# Altium PCB PCB2.PcbDoc
Units mm, origin at the board's own origin, x right, y up, seen from the top; angles counter-clockwise.
Board outline 86.99 x 90.68 mm, 4 copper layers (Top Layer, GND, POWER, Bottom Layer), stack 0.603 mm thick; 54 components, 32 nets, 166 pads, 115 vias.
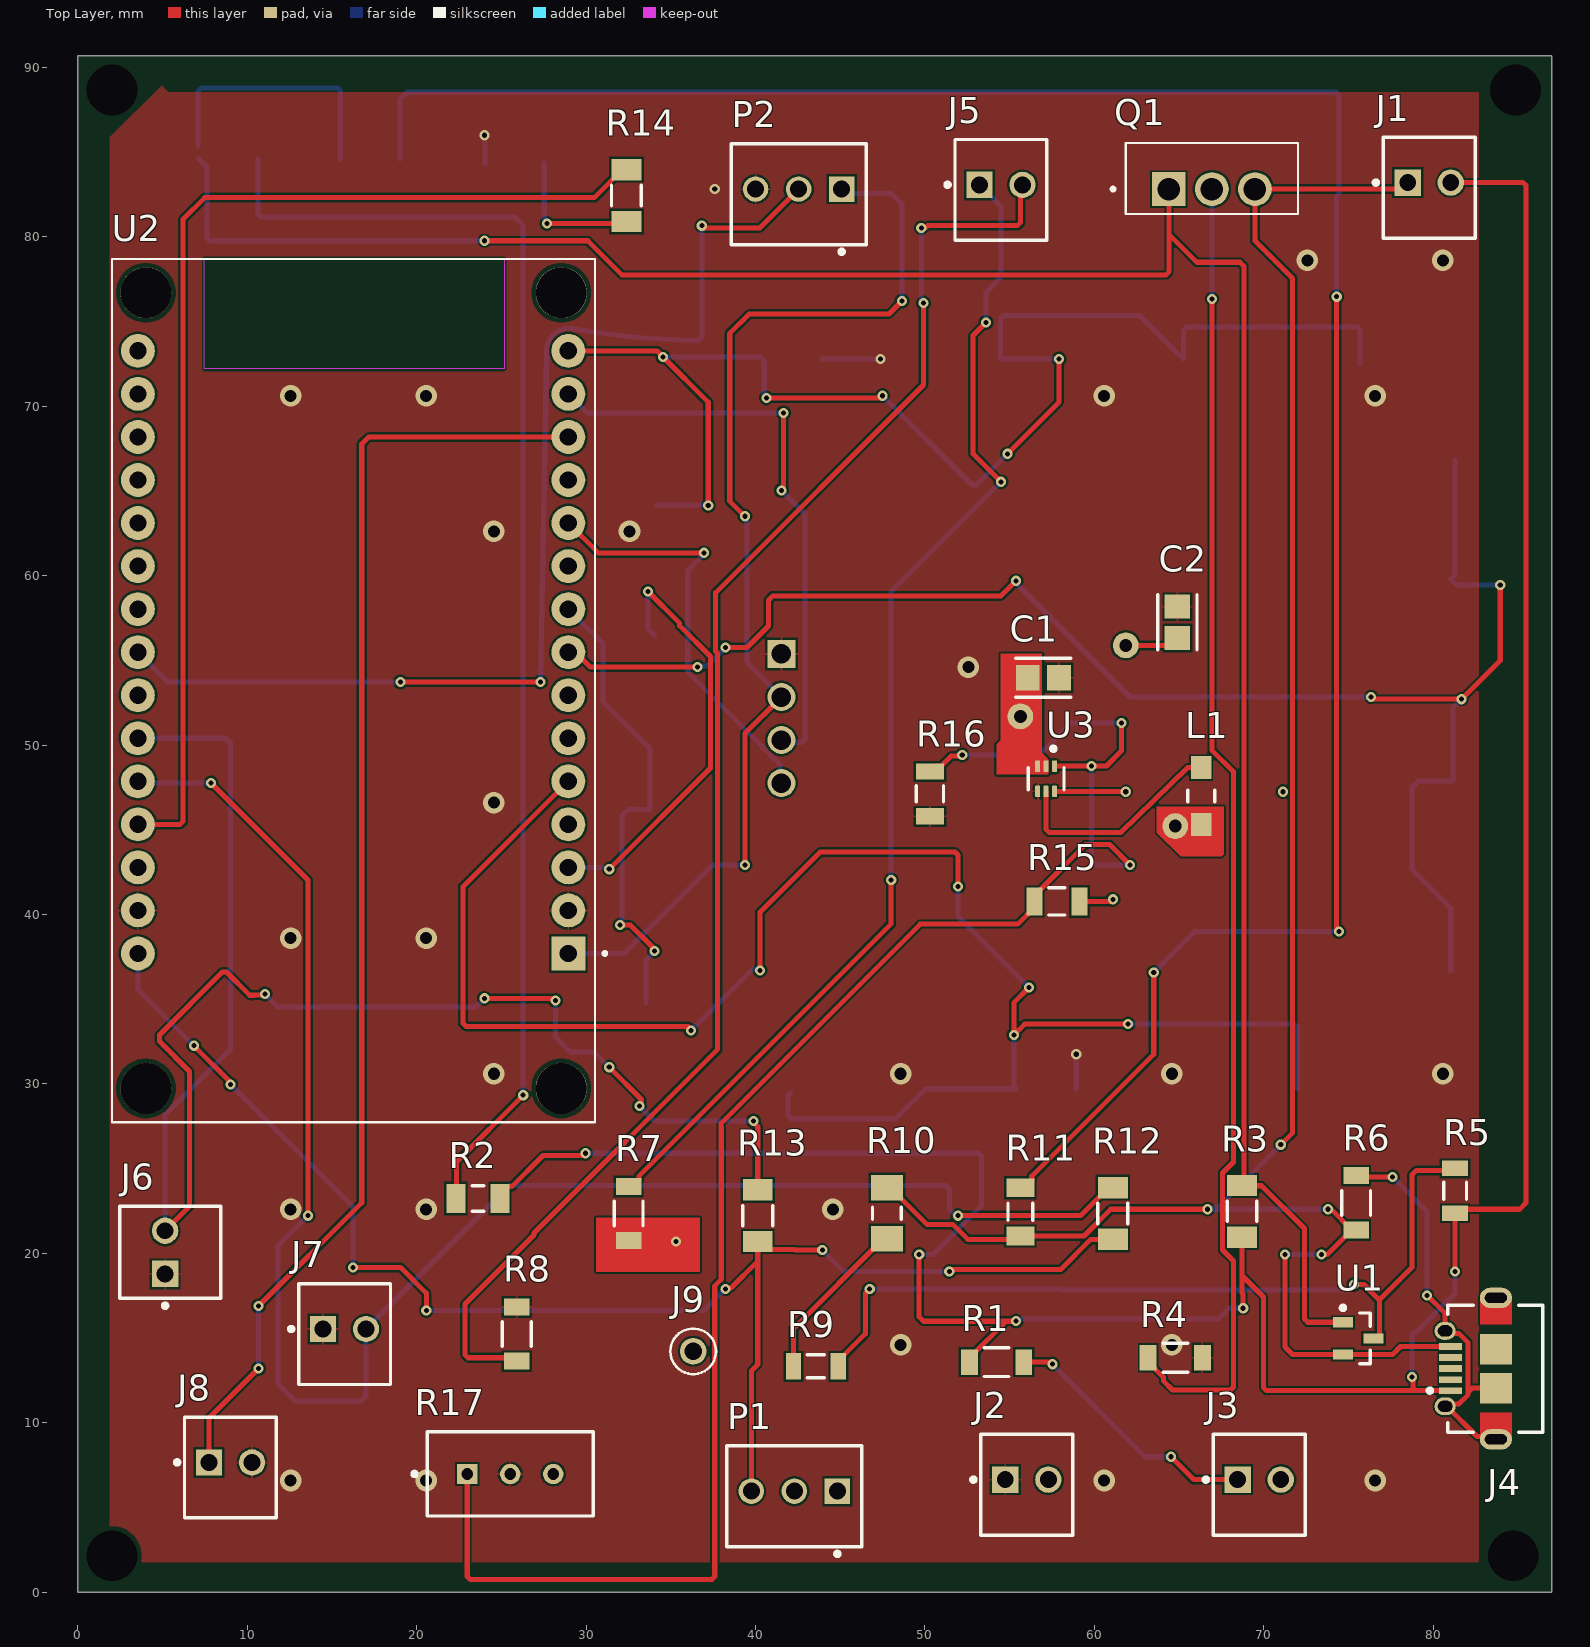
[diagram p0: Top Layer view]
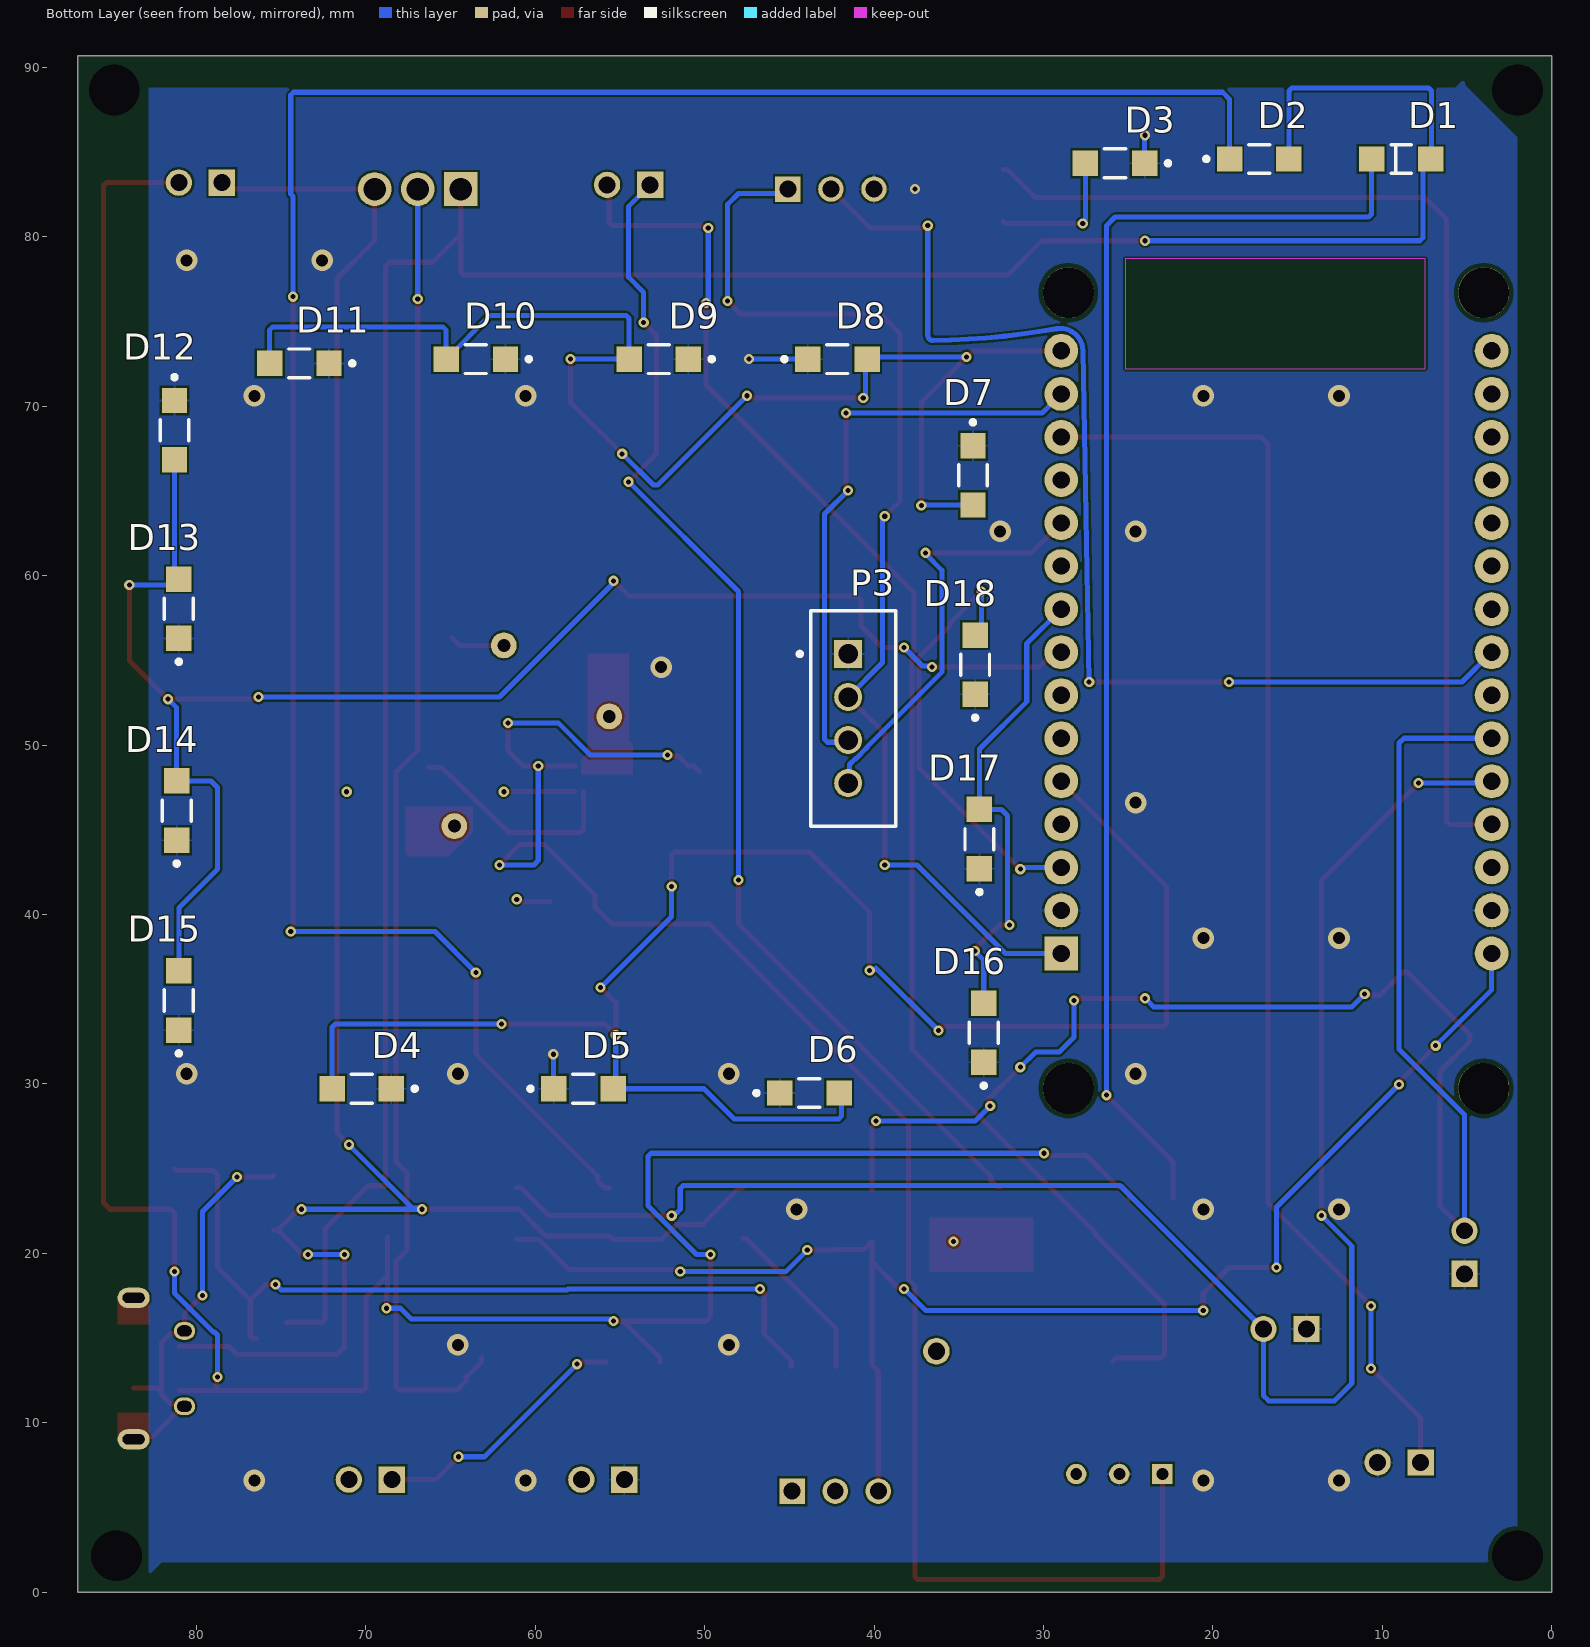
[diagram p1: Bottom Layer view, seen from below]
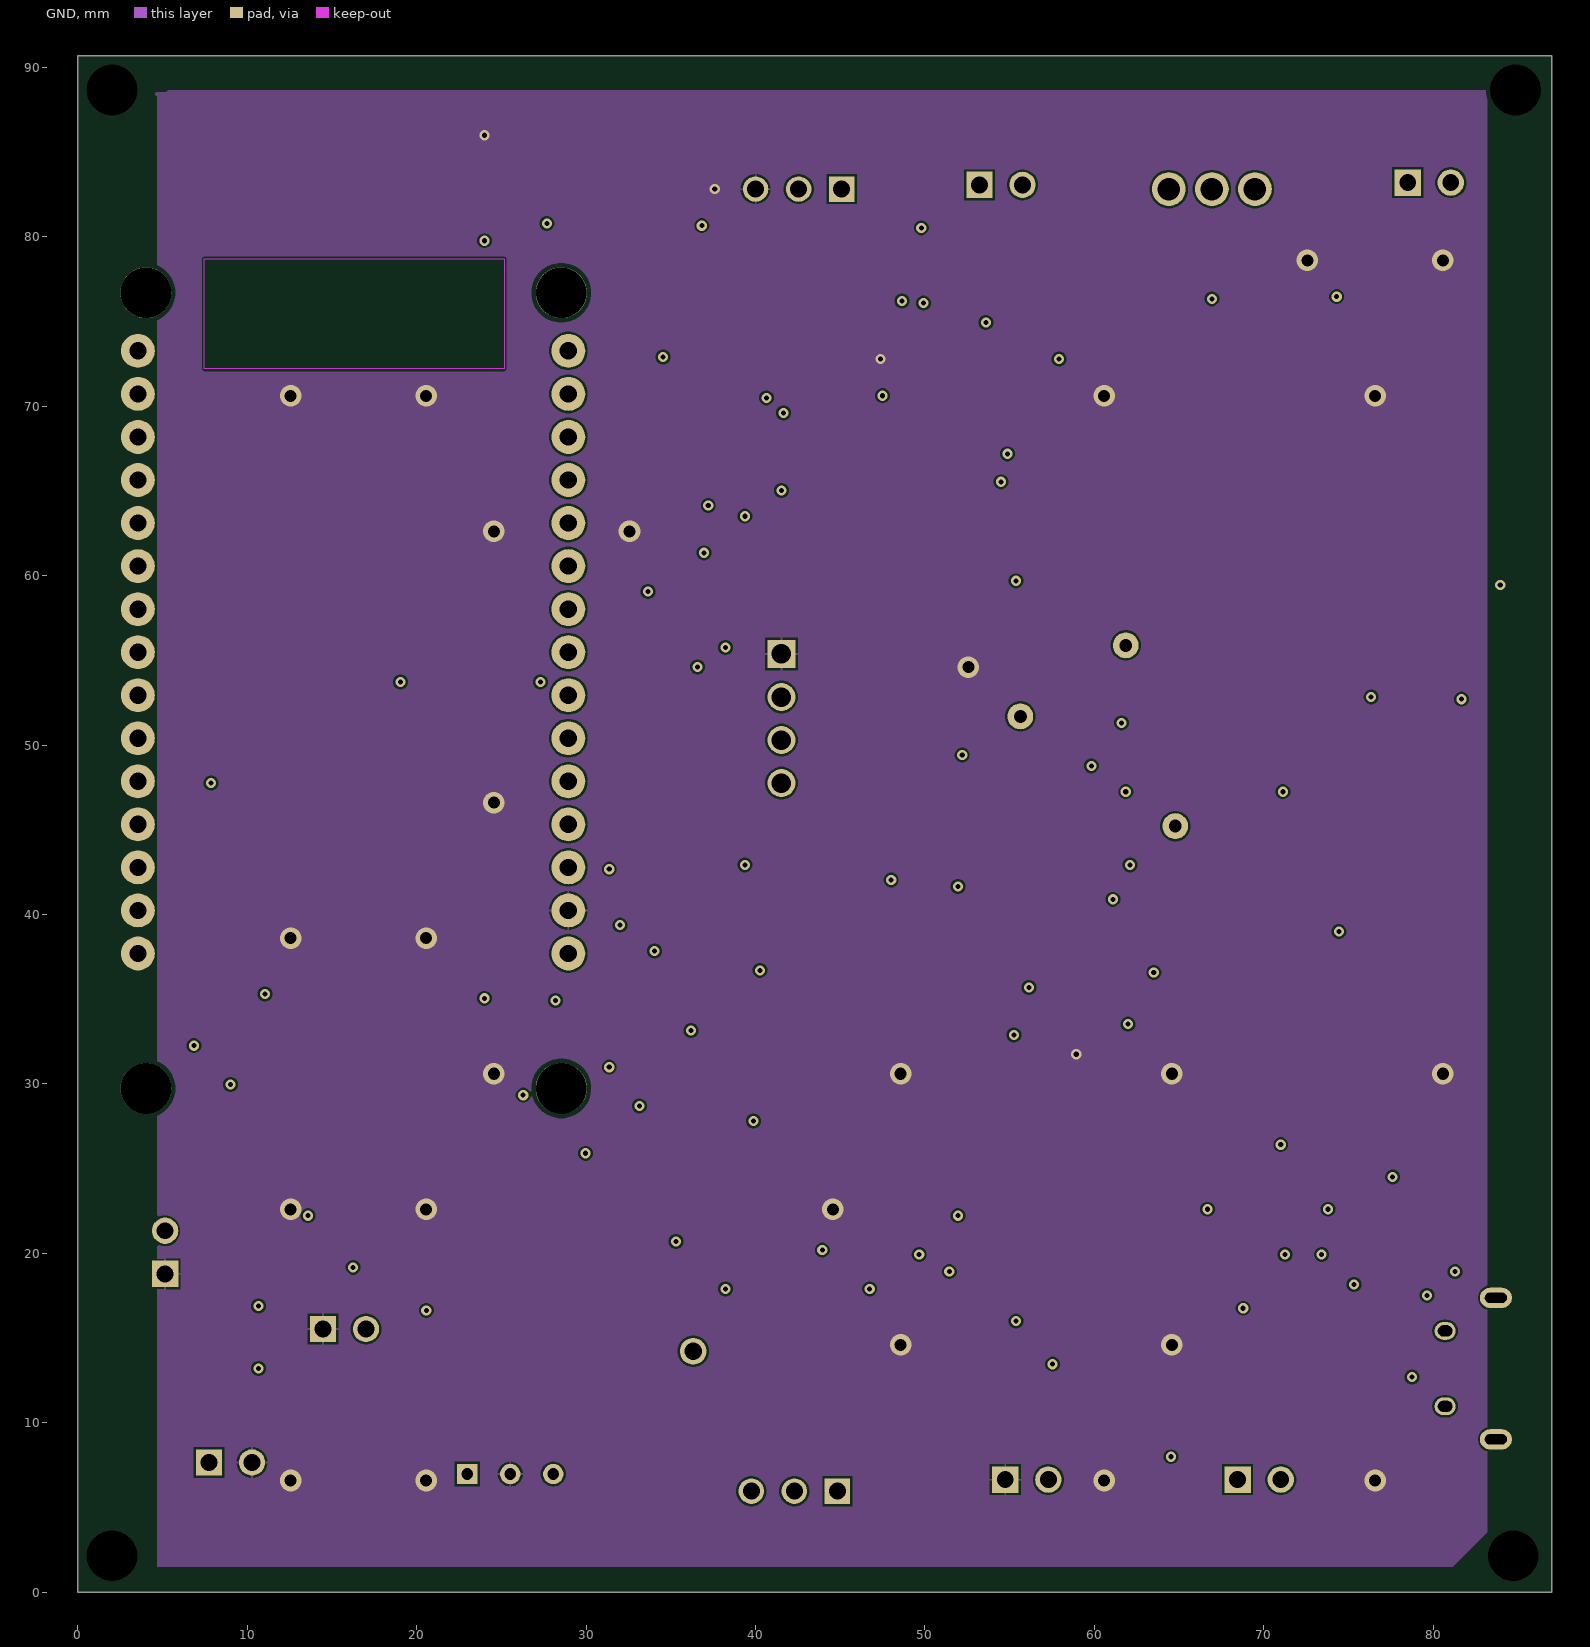
[diagram p2: GND]
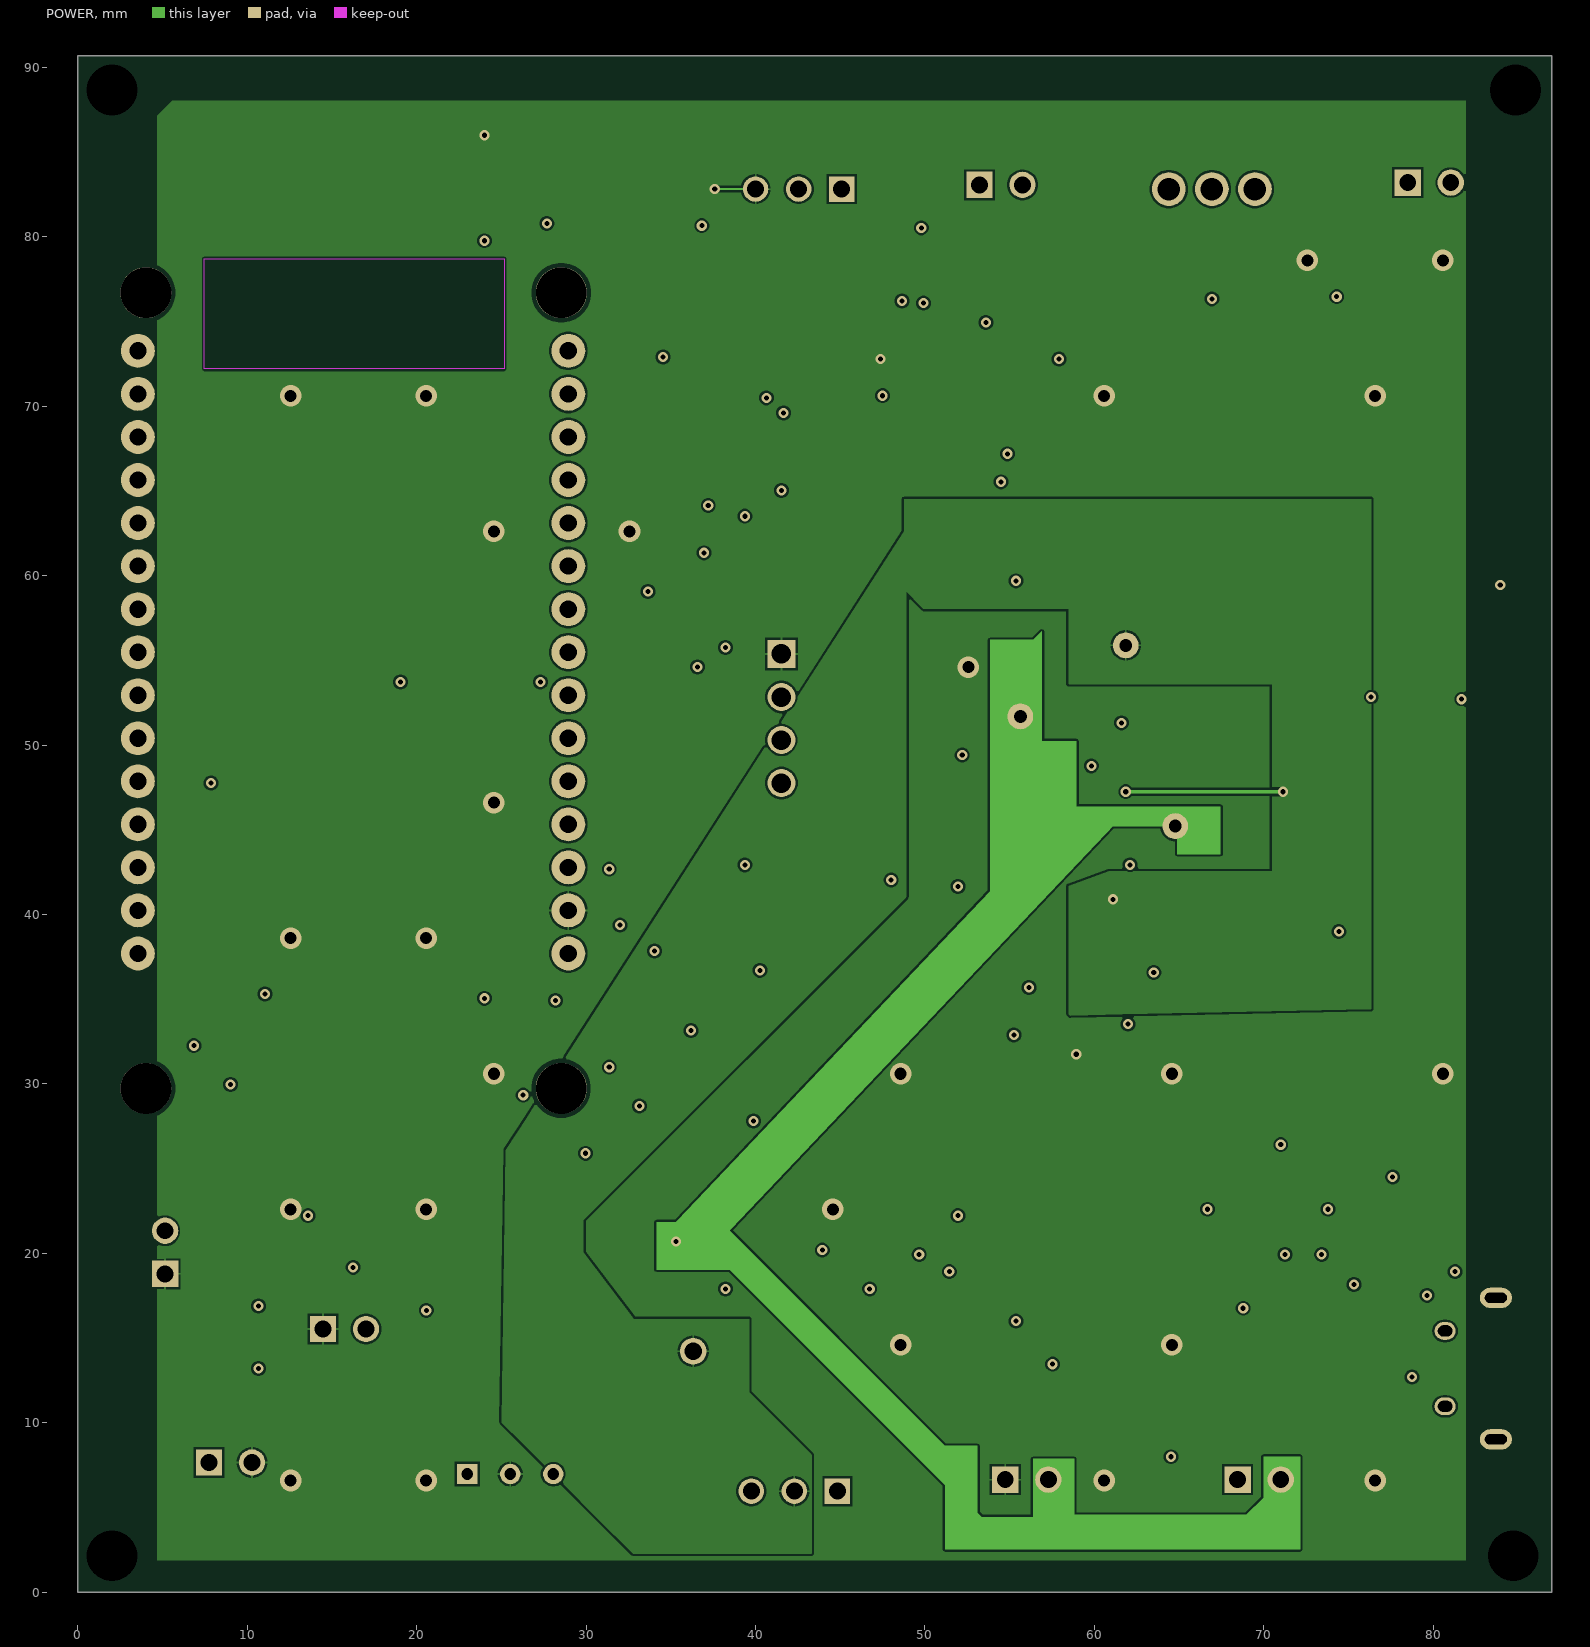
[diagram p3: POWER]
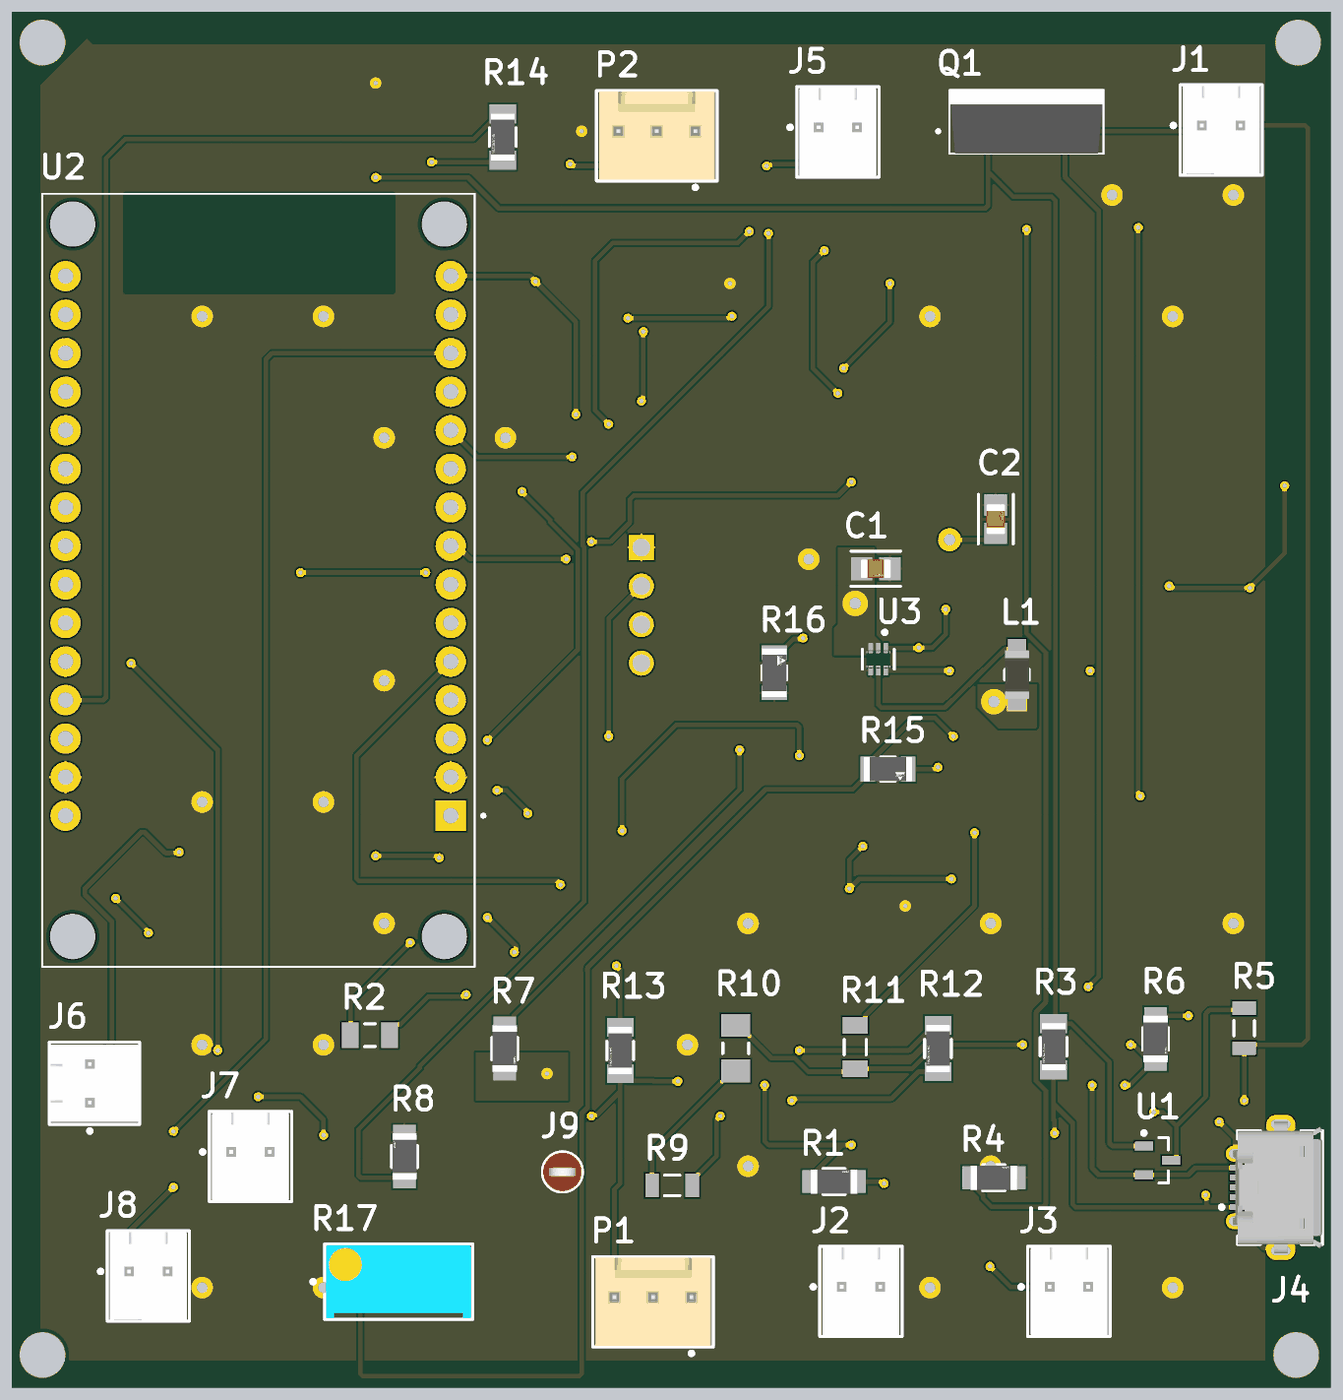
[diagram p4: 3D render of the assembled board from above, using the file's embedded part models]
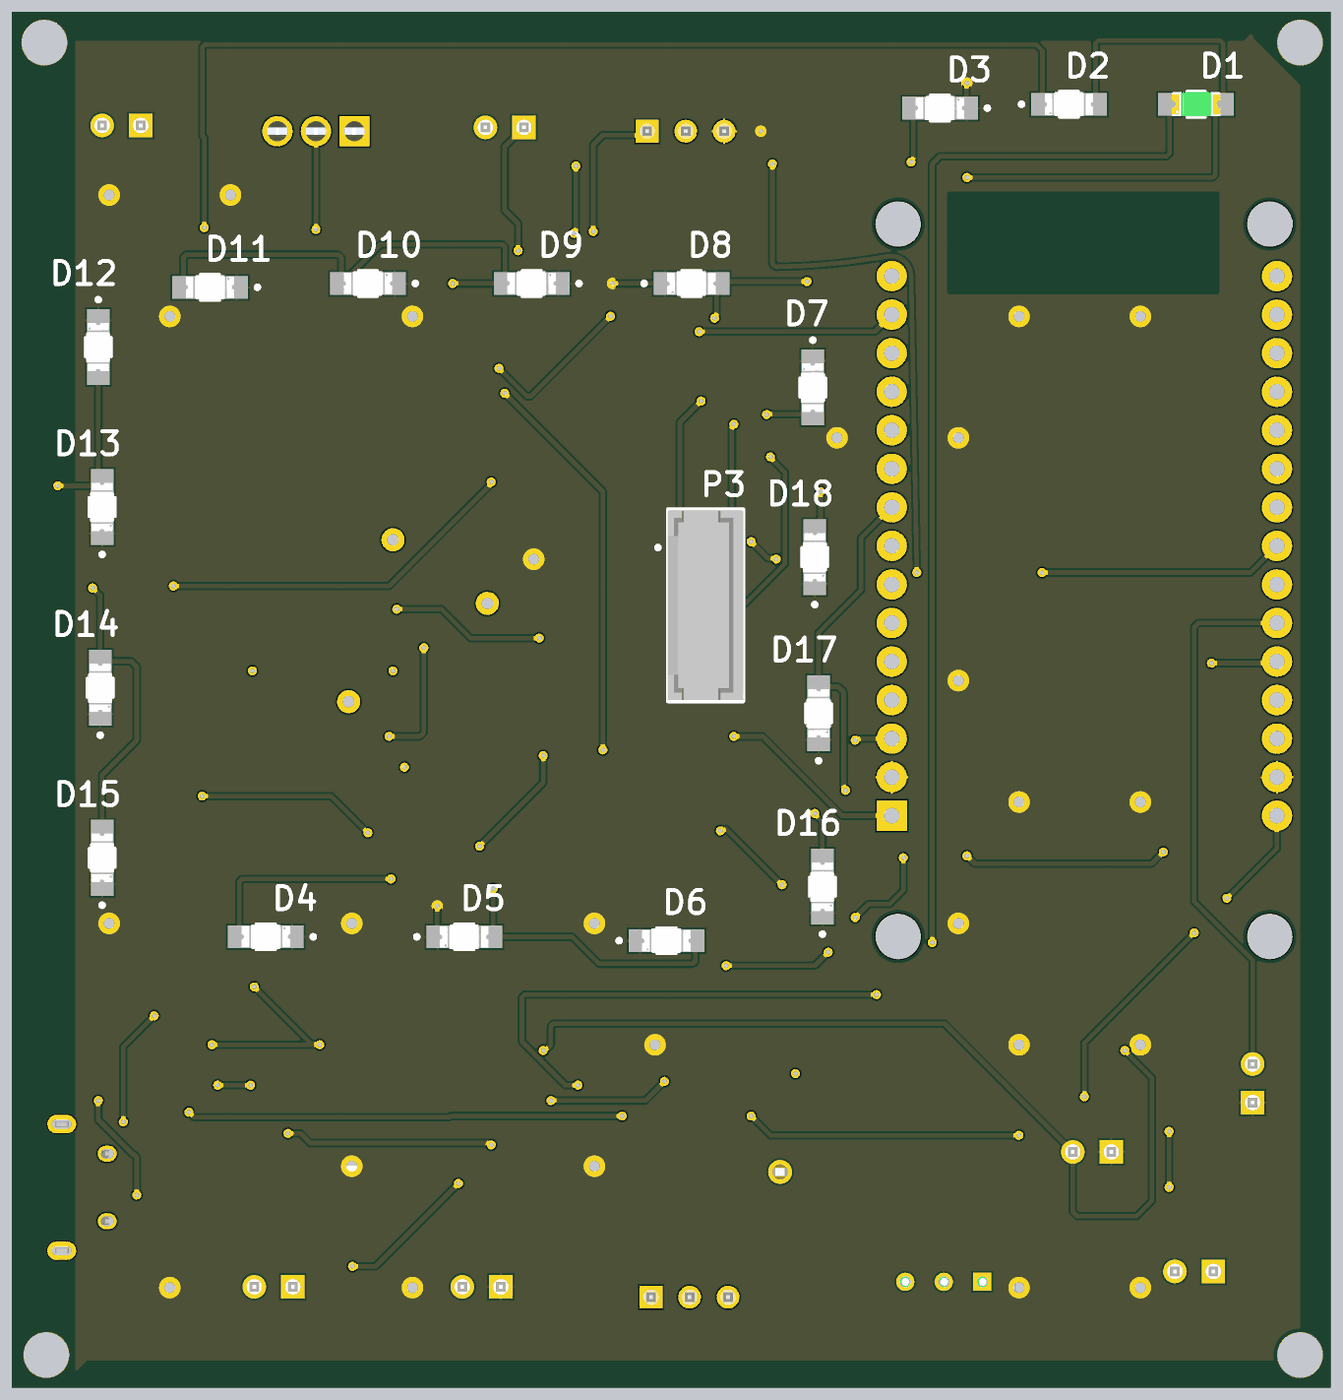
[diagram p5: 3D render of the assembled board from below, using the file's embedded part models]

## Layer stack, top to bottom
Top Solder: solder mask 0.0102, Solder Resist, Dk 3.5
Top Layer: signal copper 0.0356
Dielectric 2: prepreg 0.0711, PP-006, Dk 4.1
GND: signal copper 0.035
Dielectric 1: dielectric 0.32, FR-4, Dk 4.8
POWER: signal copper 0.035
Dielectric 3: prepreg 0.0711, PP-006, Dk 4.1
Bottom Layer: signal copper 0.0356
Bottom Solder: solder mask 0.0102, Solder Resist, Dk 3.5

## Board outline
0,0 86.995,0 86.995,90.678 0,90.678

## Design rules (kind name [scope] priority, off if disabled: settings)
BoardOutlineClearance [All] p1: gap=0.2 ignorepadtopadclearanceinfootprint=FALSE
Clearance [All] p1: gap=0.127 ignorepadtopadclearanceinfootprint=FALSE except(0.25: Arc-Hole Track-Hole SMDPad-Hole THPad-Hole Via-Hole Fill-Hole Poly-Hole Region-Hole Text-Hole)
ComponentClearance [All] p1: gap=0.127 collisioncheckmode=3 verticalgap=0.127 showdistances=TRUE
DiffPairsRouting [All] p1: maxlimit=0.254 minlimit=0.127 mostfreqgap=0.254 toplayer_prefgap=0.127 toplayer_minwidth=0.127 toplayer_maxwidth=25.4 toplayer_prefwidth=0.127 midlayer1_mingap=0.254 midlayer1_minwidth=0.381 midlayer1_maxwidth=0.381 midlayer1_prefwidth=0.381 midlayer2_mingap=0.254 midlayer2_minwidth=0.381 midlayer2_maxwidth=0.381 midlayer2_prefwidth=0.381 bottomlayer_prefgap=0.127 bottomlayer_minwidth=0.127 bottomlayer_maxwidth=25.4 bottomlayer_prefwidth=0.127 maxuncoupledlength=12.7
Height [All] p1: minheight=0 maxheight=1816.048 prefheight=12.7
HoleSize [All] p1: absolutevalues=TRUE maxlimit=6.3 minlimit=0.3 maxpercent=80.000 minpercent=20.000
HoleToHoleClearance [All] p1: gap=0.25 allowstackedmicrovias=FALSE
MinimumAnnularRing [All] p1: minimumring=0.076
MinimumSolderMaskSliver [All] p1: minsoldermaskwidth=0
PlaneClearance [All] p1: clearance=0.127
PlaneConnect PlaneConnectPowerPads [InPadClass('PowerPads')] p1: planeconnectstyle=Direct reliefexpansion=0.508 reliefentries=4 reliefconductorwidth=0.254 reliefairgap=0.254
PlaneConnect [All] p2: pad.planeconnectstyle=Relief pad.reliefexpansion=0.3 pad.reliefentries=4 pad.reliefconductorwidth=0.127 pad.reliefairgap=0.127 via.planeconnectstyle=Direct via.reliefexpansion=0.3 via.reliefentries=4 via.reliefconductorwidth=0.127 via.reliefairgap=0.127
PolygonConnect PolygonConnectPowerPads [All vs (InPadClass('PowerPads'))] p1: connectstyle=Direct reliefconductorwidth=0.254 reliefentries=4 polygonreliefangle="90 Angle" airgapwidth=0.254
PolygonConnect [All] p2: thpad.connectstyle=Relief thpad.reliefconductorwidth=0.127 thpad.reliefentries=4 thpad.polygonreliefangle="90 Angle" thpad.airgapwidth=0.127 smdpad.connectstyle=Relief smdpad.reliefconductorwidth=0.127 smdpad.reliefentries=4 smdpad.polygonreliefangle="90 Angle" smdpad.airgapwidth=0.127 via.connectstyle=Direct via.reliefconductorwidth=0.127 via.reliefentries=4 via.polygonreliefangle="90 Angle" via.airgapwidth=0.127
RoutingVias [All] p1: holewidth=0.3 width=0.6 viastyle="Through Hole" minholewidth=0.3 minwidth=0.6 maxholewidth=0.6 maxwidth=6.6
SilkToSilkClearance [All] p1: silktosilkclearance=0
SilkToSolderMaskClearance [IsPad] p1: minsilkscreentomaskgap=0.127 clearancetoexposedcopper=TRUE
SolderMaskExpansion [All] p1: expansion=0.075 istentingtop=FALSE
Width [All] p1: maxlimit=25.4 minlimit=0.127 preferedwidth=0.3 midlayer1_maxwidth=0.254 midlayer1_prefwidth=0.127 midlayer2_maxwidth=0.254 midlayer2_prefwidth=0.127 minimp=50.000000 maximp=50.000000 favimp=50.000000
20 further rules are at their usual default settings.

## Components (designator, comment, footprint, x,y, rotation, side; value= is the part's Value field where it differs from the comment)
C1 "GRM21BR61E106MA73L" FP-GRM21B-0_15-IPC_A 56.986,53.975 r0 top
C2 "GRM21BR61E106MA73L" FP-GRM21B-0_15-IPC_A 64.897,57.24 r90 top
D1 "GREEN" FP-HSMG-C150-MFG 8.89,84.582 r180 bottom
D2 "RED" FP-HSMS-C150-MFG 17.272,84.582 r180 bottom
D3 "RED" FP-HSMS-C150-MFG 25.781,84.328 r0 bottom
D4 "RED" FP-HSMS-C150-MFG 70.231,29.718 r0 bottom
D5 "RED" FP-HSMS-C150-MFG 57.15,29.718 r180 bottom
D6 "RED" FP-HSMS-C150-MFG 43.815,29.464 r180 bottom
D7 "RED" FP-HSMS-C150-MFG 34.163,65.913 r270 bottom
D8 "RED" FP-HSMS-C150-MFG 42.164,72.771 r180 bottom
D9 "RED" FP-HSMS-C150-MFG 52.705,72.771 r0 bottom
D10 "RED" FP-HSMS-C150-MFG 63.5,72.771 r0 bottom
D11 "RED" FP-HSMS-C150-MFG 73.914,72.517 r0 bottom
D12 "RED" FP-HSMS-C150-MFG 81.28,68.58 r270 bottom
D13 "RED" FP-HSMS-C150-MFG 81.026,58.039 r90 bottom
D14 "RED" FP-HSMS-C150-MFG 81.153,46.129 r90 bottom
D15 "RED" FP-HSMS-C150-MFG 81.026,34.925 r90 bottom
D16 "RED" FP-HSMS-C150-MFG 33.528,33.02 r90 bottom
D17 "RED" FP-HSMS-C150-MFG 33.782,44.45 r90 bottom
D18 "RED" FP-HSMS-C150-MFG 34.036,54.737 r90 bottom
J1 "USB" FP-61900211121-MFG 79.756,82.885 r0 top
J2 "BATTERY" FP-61900211121-MFG 56.007,6.35 r0 top
J3 "SWITCH" FP-61900211121-MFG 69.723,6.35 r0 top
J4 "47589-0001" MOLX-47589-0001_V 82.193,13.201 r90 top
J5 "CHARGING MODULE" FP-61900211121-MFG 54.483,82.758 r0 top
J6 "BUTTON_1" FP-61900211121-MFG 5.461,20.066 r90 top
J7 "BUTTTON_02" FP-61900211121-MFG 15.748,15.24 r0 top
J8 "BUZZER" FP-61900211121-MFG 9.017,7.366 r0 top
J9 "5000" FP-5000-MFG 36.322,14.224 r0 top
L1 "742792114" SMD-1206 66.294,46.99 r90 top
P1 "SPDT SWITCH" 61900311121 42.291,5.669 r0 top
P2 "TEMP" 61900311121 42.545,82.504 r0 top
P3 "DISPLAY" TECO-280371-2_V 41.529,51.562 r270 bottom
Q1 "IRFZ44NPBF" TO254P1016X419X2286-3 66.929,82.804 r0 top
R1 "0" FP-RC1206-MFG 54.229,13.589 r0 top value=0Ω
R2 "5.6K" RESC3216X70X50LL20T25 23.622,23.241 r180 top
R3 "1K" FP-CR1206-IPC_A 68.707,22.479 r270 top
R4 "0" FP-RC1206-MFG 64.77,13.843 r0 top value=0Ω
R5 "4.7K" RESC3216X70X50LL05T20 81.28,23.694 r270 top
R6 "0" FP-RC1206-MFG 75.438,22.987 r270 top value=0Ω
R7 "0" FP-RC1206-MFG 32.512,22.352 r270 top value=0Ω
R8 "0" FP-RC1206-MFG 25.908,15.24 r90 top value=0Ω
R9 "4.7K" RESC3216X70X50LL05T20 43.561,13.335 r0 top
R10 "220" RESC3216X70X50ML20T25 47.752,22.376 r90 top
R11 "15K" RESC3216X70X50NL05T20 55.626,22.451 r90 top
R12 "1K" FP-CR1206-IPC_A 61.087,22.355 r270 top
R13 "1K" FP-CR1206-IPC_A 40.132,22.225 r270 top
R14 "1K" FP-CR1206-IPC_A 32.385,82.423 r270 top
R15 "CRCW120610K0FKEA" FP-CRCW1206-e3-IPC_C 57.785,40.767 r0 top
R16 "CRCW120610K0FKEA" FP-CRCW1206-e3-IPC_C 50.292,47.117 r90 top
R17 "3296W-1-504LF" FP-3296W-MFG 25.527,6.985 r180 top value=500kΩ
U1 "TL431IL3T" SOT23-3_L 75.565,14.986 r0 top
U2 "ESP32-DEVKIT-V1" MODULE_ESP32_DEVKIT_V1 16.256,53.213 r180 top
U3 "TPS61023DRLR" FP-DRL0006A-MFG 57.15,48.006 r270 top

## Footprints (in the part's own frame and the unit in brackets; to place one, negate y for a bottom-side part, rotate by r counter-clockwise, add the part's x,y. Pads: shape width x height; smd on the part's side, far side on the other; paste and mask are expansions set on the pad)
61900311121 [mm] "2.54mm Male Locking Header, 3p"
  rect 1.5x1.5 hole 1: 1(2.54,0.3)
  round 1.5 hole 1: 2(0,0.3) 3(-2.54,0.3)
  silkscreen extent -3.98,-3.52 3.98,2.98, body extent -3.81,-2.9 3.81,2.9, height 11.53
FP-3296W-MFG [mm]
  rect 1.2x1.2 hole 0.7 paste-1000 mask+0: 1(2.54,0.005)
  round 1.2 hole 0.7 paste-1000 mask+0: 2(0,0.005) 3(-2.54,0.005)
  silkscreen extent -4.89,-2.48 5.77,2.48, body extent -4.99,-2.58 4.99,2.58, height 0.25
FP-5000-MFG [mm]
  round 1.57 hole 1.02 paste-1000 mask+0: 1(0,0)
  silkscreen extent -1.35,-1.34 1.35,1.34, body extent -1.45,-1.45 1.45,1.45, height 0.25
FP-61900211121-MFG [mm]
  rect 1.55x1.55 hole 1 paste-1000 mask+0: 1(-1.27,0.3)
  round 1.55 hole 1 paste-1000 mask+0: 2(1.27,0.3)
  silkscreen extent -3.27,-2.98 2.71,2.98, body extent -2.81,-3.08 2.81,3.08, height 0.25
FP-CR1206-IPC_A [mm]
  rect 1.258x1.762 smd paste+0 mask+0: 1(-1.527,0) 2(1.527,0)
  silkscreen extent -0.6,-0.88 0.6,0.88, body extent -2.66,-1.38 2.66,1.38, height 0.25
FP-CRCW1206-e3-IPC_C [mm]
  rect 0.956x1.658 smd paste+0 mask+0: 1(-1.326,0) 2(1.326,0)
  silkscreen extent -0.47,-0.8 0.47,0.8, body extent -1.9,-0.97 1.9,0.97, height 0.25
FP-DRL0006A-MFG [mm]
  rrect33% 0.67x0.3 smd paste+0 mask+0: 1(-0.74,0.5) 2(-0.74,0) 3(-0.74,-0.5) 4(0.74,-0.5) 5(0.74,0) 6(0.74,0.5)
  silkscreen extent -1.9,-1.05 0.65,1.05, body extent -1.17,-1.1 1.17,1.1, height 0.25
FP-GRM21B-0_15-IPC_A [mm]
  rect 1.406x1.508 smd paste+0 mask+0: 1(-0.926,0) 2(0.926,0)
  silkscreen extent -1.63,-1.15 1.63,1.15, body extent -2.13,-1.25 2.13,1.25, height 0.25
FP-HSMG-C150-MFG [mm]
  rect 1.5x1.5 smd paste+0 mask+0: 1(-1.75,0) 2(1.75,0)
  silkscreen extent -0.6,-0.85 0.6,0.85, body extent -1.6,-0.8 1.6,0.8, height 1.2
FP-HSMS-C150-MFG [mm]
  rect 1.5x1.5 smd paste+0 mask+0: 1(-1.75,0) 2(1.75,0)
  silkscreen extent -3.25,-0.85 0.63,0.85, body extent -1.6,-0.8 1.6,0.8, height 1.11
FP-RC1206-MFG [mm]
  rect 1x1.5 smd paste+0 mask+0: 1(-1.6,0) 2(1.6,0)
  silkscreen extent -0.72,-0.85 0.72,0.85, body extent -2.2,-0.95 2.2,0.95, height 0.25
MODULE_ESP32_DEVKIT_V1 [mm]
  rect 2x2 / inner round 2 / far side rect 2x2 hole 1.02: 1(-12.7,15.515)
  round 2 hole 1.02: 2(-12.7,12.975) 3(-12.7,10.435) 4(-12.7,7.895) 5(-12.7,5.355) 6(-12.7,2.815) 7(-12.7,0.275) 8(-12.7,-2.265) 9(-12.7,-4.805) 10(-12.7,-7.345) 11(-12.7,-9.885) 12(-12.7,-12.425) 13(-12.7,-14.965) 14(-12.7,-17.505) 15(-12.7,-20.045) 16(12.7,-20.045) 17(12.7,-17.505) 18(12.7,-14.965) 19(12.7,-12.425) 20(12.7,-9.885) 21(12.7,-7.345) 22(12.7,-4.805) 23(12.7,-2.265) 24(12.7,0.275) 25(12.7,2.815) 26(12.7,5.355) 27(12.7,7.895) 28(12.7,10.435) 29(12.7,12.975) 30(12.7,15.515)
  round 3 hole 3 unplated: ""(-12.28,23.475) ""(-12.28,-23.475) ""(12.23,23.475) ""(12.23,-23.475)
  Keep-Out Layer region: 8.78,-25.475 -8.91,-25.475 -8.91,-18.985 8.78,-18.985
  Keep-Out Layer region: 8.78,-25.475 -8.91,-25.475 -8.91,-18.985 8.78,-18.985
  silkscreen extent -14.95,-25.48 14.23,25.48
MOLX-47589-0001_V [mm] "SMD, 5-Leads, Body 7.5x5.6mm, Pitch 0.65mm"
  rect 0.4x1.35 smd: 1(-1.3,1.175) 2(-0.65,1.175) 3(0,1.175) 4(0.65,1.175) 5(1.3,1.175)
  oval 1.05x1.25 hole 0.65 slot 0.85 at 90 deg: 6(-2.225,1.5) 7(2.225,1.5)
  oval 1.2x1.9 hole 0.6 slot 1.3 at 90 deg: 8(-4.175,-1.5) 11(4.175,-1.5)
  rect 1.8x1.9 smd: 9(-1.15,-1.5) 10(1.15,-1.5)
  Top Layer region: 2.6,-2.45 4.175,-2.45 4.175,-0.55 2.6,-0.55
  Top Layer region: -2.6,-0.55 -4.175,-0.55 -4.175,-2.45 -2.6,-2.45
  silkscreen extent -3.75,-4.25 3.75,2.52, body extent -4.32,-4.25 4.32,1.64, height 2.74
RESC3216X70X50LL05T20 [mm] "Chip Resistor, 2-Leads, Body 3.20x1.60mm, IPC High Density"
  rect 0.9x1.55 smd: 1(-1.325,0) 2(1.325,0)
  silkscreen extent -0.5,-0.67 0.5,0.67, body extent -1.63,-0.82 1.62,0.82, height 0.7
RESC3216X70X50LL20T25 [mm] "Chip Resistor, 2-Leads, Body 3.20x1.60mm, IPC High Density"
  rect 1.1x1.7 smd: 1(-1.3,0) 2(1.3,0)
  silkscreen extent -0.35,-0.75 0.35,0.75, body extent -1.7,-0.9 1.7,0.9, height 0.7
RESC3216X70X50ML20T25 [mm] "Chip Resistor, 2-Leads, Body 3.20x1.60mm, IPC Low Density"
  rect 1.5x1.9 smd: 1(-1.5,0) 2(1.5,0)
  silkscreen extent -0.35,-0.85 0.35,0.85, body extent -1.7,-0.9 1.7,0.9, height 0.7
RESC3216X70X50NL05T20 [mm] "Chip Resistor, 2-Leads, Body 3.20x1.60mm, IPC Medium Density"
  rect 1.1x1.65 smd: 1(-1.425,0) 2(1.425,0)
  silkscreen extent -0.5,-0.72 0.5,0.72, body extent -1.63,-0.82 1.62,0.82, height 0.7
SMD-1206 [mm] "Chip Inductor, 2-Leads, Body 3.2x1.6mm"
  rect 1.35x1.2 smd: 1(-1.675,0) 2(1.675,0)
  silkscreen extent -0.35,-0.8 0.35,0.8, body extent -1.6,-0.8 1.6,0.8, height 1.09
SOT23-3_L [mm] "SOT23, 3-Leads, Body 2.9x1.3mm, Pitch 0.95mm, Lead Span 2.4mm, IPC High Density"
  rect 1.2x0.6 smd: 1(-0.9,0.95) 2(-0.9,-0.95) 3(0.9,0)
  silkscreen extent -1.02,-1.5 0.7,1.92, body extent -0.7,-1.52 0.7,1.52, height 1.12
TECO-280371-2_V [mm] "Male Header, 4-Leads, Body 12.7x5mm, Pitch 2.54"
  rect 1.65x1.65 hole 1.15: 1(-3.81,0)
  round 1.65 hole 1.15: 2(-1.27,0) 3(1.27,0) 4(3.81,0)
  silkscreen extent -6.35,-2.98 6.35,2.8, body extent -6.22,-2.21 6.23,2.79, height 12.6
TO254P1016X419X2286-3 [mm]
  rect 1.995x1.995 / inner round 1.995 / far side rect 1.995x1.995 hole 1.33: 1(-2.54,0)
  round 1.995 hole 1.33: 2(0,0) 3(2.54,0)
  silkscreen extent -5.93,-1.48 5.08,2.72, body extent -5.08,-1.47 5.08,2.72, height 22.86

## Part data
C1 C2: library part CMP-06035-013048-1, "Chip Multilayer Ceramic Capacitors for General Purpose, 0805, 10uF, X5R, 15%, 20%, 25V", Capacitance=10uF, Case Code (Imperial)=0805, Case Code (Metric)=2012, Dielectric=X5R, Max Operating Temperature=85°C, Min Operating Temperature=-55°C, Package Quantity=3000, Resistor Type=Ceramic, Tolerance=20%, Voltage Rating=25V, Case/Package=0805, Depth=1.25mm, Height=1.25mm, Lead Free="Lead Free", Length=2mm, Mount="Surface Mount", Packaging="Tape and Reel", REACH SVHC="No SVHC", Termination=SMD/SMT, Thickness=0.055inch, Voltage Rating (DC)=25V, Weight=0.000335oz, Width=0.049inch
D1: library part CMP-2000-05061-2, "LED GREEN DIFFUSED 1206 SMD", Colour=Green, Forward Current=20mA, Forward Voltage=2.2V, Manufacturer=Broadcom, Manufacturer Part Number=HSMG-C150, Max Junction Temp=+95°C, Power Dissipation=65mW, Reverse Voltage=5V, Temperature="-40°C to +85°C", Temperature Range High=+85°C, Temperature Range Low=-40°C, Automotive=No, Category=Diode, ComponentLink2Description=Datasheet, ComponentLink2URL=https://docs.broadcom.com/docs/AV02-0551EN, Device Class L1=Optoelectronics, Device Class L2=LEDs, Device Class L3=unset, Digikey Description="LED GREEN DIFFUSED 1206 SMD", Height=1.2mm, Ipc Land Pattern Name=DIOCP320160X55, Lead Free=Yes, Led Orientation="Top View", Luminous Intensity=15mcd, Mouser Description="LED Uni-Color Green 570nm 2-Pin Chip LED T/R", Octopart=https://octopart.com/hsmg-c150-broadcom-71131304, Package=HSMG-C150, Peak Emmision Wavelength=570nm, RoHS=TRUE, Viewing Angle=170°, Wavelength=572nm
D2 D3 D4 D5 D6 D7 D8 D9 D10 D11 D12 D13 D14 D15 D16 D17 D18: library part CMP-21615-000001-1, "LED RED DIFFUSED CHIP SMD", Case Code (Imperial)=1206, Case Code (Metric)=3216, Color=Red, Forward Current=20mA, Forward Voltage=2.1V, Lens Color=White, Max Operating Temperature=85°C, Min Operating Temperature=-40°C, Package Quantity=1, Power Dissipation=65mW, Reverse Voltage=5V, Case/Package=1206, Depth=1.6mm, Dominant Wavelength=626nm, Height=1.1mm, Illumination Color=Red, Lead Free="Lead Free", Length=3.2mm, Lens Style=Rectangular, Lens Transparency=Diffused, Luminous Intensity=10mcd, Mount="Surface Mount", Number Of Elements=1, Number of LEDs=1, Number of Pins=2, Packaging="Tape and Reel", Power Rating=65mW, Radiation Hardening=No, REACH SVHC="No SVHC", Test Current=20mA, Viewing Angle=170°, Wavelength=626nm, Width=1.6mm
J1 J2 J3 J5 J6 J7 J8: library part CMP-1502-00584-2, "CONN HEADER VERT 2POS 2.54MM", Color=Beige, Current Rating=3A, Flammability Rating="UL94 V-0", Insulation Resistance=1GR, Max Operating Temperature=105°C, Min Operating Temperature=-40°C, Package Quantity=1000, Voltage Rating=250V, Connector Type=Header, Contact Finish - Mating=TIN, Contact Gender=Male, Contact Material="Copper Alloy", Contact Mating Length=0.295inch, Contact Plating=Tin, Contact Shape=Square, Contact Type="Male Pin", Fastening Type=Friction, Gender=Male, Height=14.2mm, Housing Material=Nylon, Insulation Color=Beige, Insulation Material=Nylon, Length=5.8mm, Mount="Through Hole", Number of Contacts=2, Number of Positions=2, Number of Rows=1, Packaging=Bulk, Pitch=2.54mm, RoHS Compliant=Yes, Series=WR-WTB, Termination="Through Hole", Width=5.12mm
J4: library part CMP-2000-05610-1, "Right Angle Female Type AB Micro USB Connector, 30 V, 1.8 A, -30 to 85 degC, RoHS, Tape and Reel", Color=Black, Current Rating=1.8A, Manufacturer=Molex, Operating Temperature Range=-20Cto+85C, Package Description="Micro USB Connector, Pitch 0.65 mm, 5 Positions, Body 7.5 x 5.6 mm", Voltage Rating=30VAC, Brand=Molex, Connector Type=MicroUSBTypeABreceptacle, Contact Material=CopperAlloy, Contact Plating=Gold, Datasheet URL=http://www.molex.com/webdocs/datasheets/pdf/en-us/0475890001_IO_CONNECTORS.pdf, Datasheet Version=12/2016, Gender=Female, Manufacturer URL=http://www.molex.com/, Mounting Angle=Right, Mounting Technology=SurfaceMount, Number of Contacts=5Contact, Number of Ports=1Port, Package Reference=47589-0001, Package URL=http://www.molex.com/pdm_docs/sd/475890001_sd.pdf, Packaging=Reel, Product=MicroUSBTypeABConnectors, Product Category=USBConnectors, RoHS=True, Series=47589, Standard=USB, Termination Style=SMD/SMT
J9: library part CMP-19636-000027-1, "PC TEST POINT MINIATURE RED", Color=Red, Flammability Rating="UL94 V-0", Package Quantity=100, Body Material=Bronze, Contact Material=Bronze, Contact Plating=Tin, Height=0.3inch, Hole Diameter=1.6mm, Housing Color=Red, Inside Diameter=1.27mm, Insulation=Insulated, Lead Free="Lead Free", Length=7.62mm, Material=Nylon, Mount=PCB, Number of Contacts=1, Number of Ports=1, Orientation=Straight, Outside Diameter=2.54mm, Packaging=Bulk, Plating=Silver, REACH SVHC="No SVHC", RoHS Compliant=Yes, Series=THM
L1: library part CMP-0220-00021-1, "SMD EMI Suppression Ferrite Bead WE-CBF, Z = 50 Ohm", ComponentLink1Description="Manufacturer Link", ComponentLink1URL=http://www.we-online.com, ComponentLink2Description=Datasheet, ComponentLink2URL=http://www.we-online.de/katalog/media/pdf/742792114.pdf, DatasheetVersion=Dec-2005, Impedance="50 Ohm", PackageDescription="Chip Inductor, 2-Leads, Body 3.2 x 1.6 mm", PackageReference=SMD-1206, PackageVersion=2007
P1 P2: library part CMP-1502-00585-1, "Male Locking Header WR-WTB, THT, Vertical, pitch 2.54 mm, 1 x 3 position", Contact Resistance=20mOhm, Manufacturer="Wurth Elektronik", Operating Temperature=-40to105degC, Package Reference=61900311121, Working Voltage=250VAC, Datasheet URL=https://katalog.we-online.de/em/datasheet/6190xx11121.pdf, Gender=Male, Manufacturer URL=http://www.we-online.de, Mounting Technology=THT, Orientation=Vertical, Packaging=Bag, Part Number=61900311121, Pitch=2.54mm, Position=1x3, Publisher=WurthElektronik
P3: library part CMP-2000-05548-1, "Male Header, Pitch 2.54 mm, 1 x 4 Position, Height 12.8 mm, Tail Length 3.5 mm, -55 to 105 degC, RoHS, Bulk", Color=Black, Manufacturer="TE Connectivity", Package Description="Male Header, Pitch 2.54 mm, 1 x 4 Position, Height 12.8 mm, Tail Length 3.5 mm", Package Reference=280371-2, Standard Package=1,000, 3D Model=280371-2.pdf, Category=Connectors,Interconnects, Connector Type=Header,Shrouded, Contact Finish=Gold, Contact Finish Thickness=15µin(0.38µm), Contact Mating Length="0.260\"(6.60mm)", Contact Type=MalePin, Datasheet URL=http://www.te.com/commerce/DocumentDelivery/DDEController?Action=showdoc&DocId=Customer+Drawing%7F280370%7FM1%7Fpdf%7FEnglish%7FENG_CD_280370_M1.pdf%7F280371-2, Datasheet Version="Rev. M1, 08/2016", Dynamic Catalog=AMPMODUModIISeries, Family=RectangularConnectors-Headers,MalePins, Manufacturer URL=http://www.te.com/, Mounting Technology=ThroughHole, Mounting Type=ThroughHole, Number of Positions=4, Number of Positions Loaded=All, Number of Rows=1, Other Names="280371-2-ND / A106401", Packaging=Bulk, Pitch="0.100\"(2.54mm)", RoHS Information=280371-2StatementofCompliance, Series=AMPMODUModII, Termination=Solder
Q1: "N-Channel 55 V 49A (Tc) 94W (Tc) Through Hole TO-220AB", Package="TO-220-3 Infineon", Check_prices=https://www.snapeda.com/parts/IRFZ44NPBF/Infineon+Technologies/view-part/?ref=eda, Digi-Key_Part_Number=IRFZ44NPBF-ND, MF=Infineon, MP=IRFZ44NPBF, Purchase-URL=https://pricing.snapeda.com/search/part/IRFZ44NPBF/?ref=eda, SnapEDA_Link=https://www.snapeda.com/parts/IRFZ44NPBF/Infineon+Technologies/view-part/?ref=snap
R1 R4 R6 R7 R8: library part CMP-2100-03681-2, "RES SMD 0 OHM JUMPER 1/4W 1206", Manufacturer=YAGEO, Manufacturer Part Number=RC1206JR-070RL, Package=RC1206, Power Rating=0.25W, Resistance=0Ω, Temperature="-55°C to +155°C", Temperature Coefficient=300ppm/°C, Temperature Range High=+155°C, Temperature Range Low=-55°C, Tolerance=5%, Voltage Rating=200V, Automotive=No, Category=Res, ComponentLink2Description=Datasheet, ComponentLink2URL=https://www.yageo.com/upload/media/product/productsearch/datasheet/rchip/PYu-RC_Group_51_RoHS_L_10.pdf, Composition="Thick Film", Device Class L1="Passive Components", Device Class L2=Resistors, Device Class L3="Chip SMD Resistors", Digikey Description="RES SMD 0 OHM JUMPER 1/4W 1206", Footprint Url=https://www.yageo.com/upload/website/yageo_PYu-R_Mount_10_19050818_343.pdf, Height=0.65mm, Ipc Land Pattern Name=RESC310160X55, Lead Free=Yes, Mouser Description="Resistor: thick film; SMD; 1206; 0O; 0.25W; ±5%; -55÷155°C", Octopart=https://octopart.com/rc1206jr-070rl-yageo-40025601, RoHS=TRUE, Series=RC
R2: library part CMP-2003-04481-1, Manufacturer=Panasonic, Part Number=ERA8AEB562V
R3 R12 R13 R14: library part CMP-07231-002641-1, "Thick Film Chip Resistors 1206 1kΩ 0.25W 1% 100ppm/°C", Case Code (Imperial)=1206, Case Code (Metric)=3216, Max Operating Temperature=155°C, Max Power Dissipation=250mW, Min Operating Temperature=-55°C, Package Quantity=1, Resistance=1kR, Temperature Coefficient=100ppm/°C, Tolerance=1%, Voltage Rating=200V, Case/Package=1206, Composition="Thick Film", Contact Plating=Tin, Depth=1.6mm, Features="Moisture Resistant", Height=0.6mm, Length=3.2mm, Military Standard=Not, Mount="Surface Mount", Number of Pins=2, Number of Terminations=2, Packaging="Tape and Reel", Power Rating=250mW, Radiation Hardening=No, REACH SVHC="No SVHC", Termination=SMD/SMT, Thickness=610um, Voltage Rating (DC)=200V, Width=1.6mm
R5 R9: library part CMP-2003-00848-1, Manufacturer=Panasonic, Part Number=ERJ8ENF4701V
R10: library part CMP-2003-04438-1, Manufacturer=Panasonic, Part Number=ERA8AEB221V
R11: library part CMP-2003-00118-1, Manufacturer=Panasonic, Part Number=ERJ-8ENF1502V
R15 R16: library part CMP-2003-04807-2, "RES Thick Film, 10kΩ, 1%, 0.25W, 100ppm/°C, 1206", Case Code (Imperial)=1206, Case Code (Metric)=3216, Max Operating Temperature=155°C, Max Power Dissipation=250mW, Min Operating Temperature=-55°C, Package Quantity=10, Resistance=10kR, Temperature Coefficient=100ppm/°C, Tolerance=1%, Voltage Rating=200V, Case/Package=1206, Composition="Thick Film", Contact Plating=Tin, Depth=1.6mm, Features="Automotive AEC-Q200", Height=0.55mm, Lead Free="Lead Free", Length=3.2mm, Military Standard=Not, Number of Pins=2, Number of Terminations=2, Packaging="Tape and Reel", Power Rating=250mW, Radiation Hardening=No, Termination=SMD/SMT, Voltage Rating (DC)=200V, Weight=0.000353oz, Width=0.063inch, Working Voltage=200V
R17: library part CMP-2000-05583-2, "TRIMMER 500K OHM 0.5W PC PIN TOP", Manufacturer=Bourns, Package=3296W, Power Rating=0.5W, Resistance=500kΩ, Temperature="-55°C to +125°C", Temperature Coefficient=100ppm/°C, Temperature Range High=+125°C, Temperature Range Low=-55°C, Tolerance=10%, Voltage Rating=300V, Automotive=No, Category=Res, ComponentLink2Description=Datasheet, ComponentLink2URL=https://www.bourns.com/docs/Product-Datasheets/3296.pdf, Device Class L1="Passive Components", Device Class L2=Resistors, Device Class L3="Variable Resistors and Potentiometers", Digikey Description="TRIMMER 500K OHM 0.5W PC PIN TOP", Height=12.05mm, Lead Free=Yes, Manufacturer Part Number=3296W-1-504LF, Mouser Description="Trimmer; Cermet; Rest 500 Kilohms; PCB; 25 Turns; Pwr-Rtg 0.5W", Octopart=https://octopart.com/3296w-1-504lf-bourns-143884, RoHS=TRUE, Series="Trimpot 3296-Sealed", Standoff Height=0.38mm
U1: library part CMP-0242-00062-1, "Programmable Voltage Reference, 2.5 to 36V, 3-Pin SOT23-3, Tape and Reel", ComponentLink1Description="Manufacturer URL", ComponentLink1URL=http://www.st.com, ComponentLink2Description=Datasheet, ComponentLink2URL=http://www.st.com/internet/com/TECHNICAL_RESOURCES/TECHNICAL_LITERATURE/DATASHEET/CD00000986.pdf, DatasheetVersion=Oct-2011, PackageDescription="3-Pin SOT-23 Package 0.95 mm Pitch, 2.4 mm Lead Span", PackageReference=SOT23-3, PackageVersion=2011
U2: "Dual core, Wi-Fi: 2.4 GHz up to 150 Mbits/s,BLE (Bluetooth Low Energy) and legacy Bluetooth, 32 bits, Up to 240 MHz", Package=None, Availability="Not in stock", Check_prices=https://www.snapeda.com/parts/ESP32-DEVKIT-V1/Do+it/view-part/?ref=eda, MF="Do it", MP=ESP32-DEVKIT-V1, Price=None, SnapEDA_Link=https://www.snapeda.com/parts/ESP32-DEVKIT-V1/Do+it/view-part/?ref=snap
U3: library part CMP-04918-000638-1, "FINISH GOODS FOR TPS61023"

## Free pads (board coordinates)
  round 1.524 hole 3: 11(2.032,88.646) 12(2.032,2.159) 13(84.709,2.159) 14(84.836,88.646)
  round 1.524 hole 0.762: 20(55.626,51.689) 21(64.77,45.212) 22(61.849,55.88)

## Via types
v1: diameter 0.6, hole 0.3, Top Layer to Bottom Layer, 90 vias
v2: diameter 1.27, hole 0.711, Top Layer to Bottom Layer, 25 vias

## Nets (pads, with @x,y where several pads share a name; then routed paths per layer and width w, separated by ;. In a path a pad name is that pad's centre, name@x,y a point inside that pad or via, vN(x,y) a via of type N, cw(c..) or ccw(c..) an arc to the next point about the centre after c; other vN are vias at no path point)
-5: J1.1 J4.5 Q1.3 R6.2 R10.2 R11.1 U1.2 | length 123
  Top Layer w0.3: R10.2 47.952,23.876 50.111,21.717 51.635,21.717 52.524,20.828 55.428,20.828 R11.1 59.383,21.026 60.963,22.606 v1(66.675,22.606) ; v1(70.993,26.416) 71.697,27.12 71.697,77.528 69.469,79.756 Q1.3 78.105,82.804 J1.1 ; v1(71.247,19.939) 71.247,14.478 71.689,14.036 U1.2 77.597,14.036 78.062,14.501 J4.5 ; v1(73.406,19.939) 73.74,19.939 R6.2@75.188,21.387 ; v1(73.787,22.606) 73.969,22.606 R6.2@75.188,21.387 ; R6.2 R6.2@75.188,21.387
  Bottom Layer w0.3: v1(70.993,26.416) 67.24,22.663 66.732,22.663 v1(66.675,22.606) v1(73.787,22.606) ; v1(71.247,19.939) v1(73.406,19.939)
GND: C1.2 C2.2 D3.1 D4.1 D5.1 D6.1 D7.1 D8.1 D9.1 D10.1 D11.1 D12.1 D13.1 D14.1 D15.1 D16.1 D17.1 D18.1 J2.1 J6.1 J7.1 J8.2 P2.3 P3.1 R4.2 R8.2 R16.1 R17.2 U2.2 U2.29 U3.4 | length 9.6
  POWER w0.127: v1(37.592,82.804) P2.3
  Bottom Layer w0.3: v1(24.003,85.979) 24.031,85.951 D3.1 ; D8.1 v1(47.371,72.771) ; D5.1 58.928,29.746 v1(58.928,31.75)
  other v2: 12.564,6.6 20.564,6.6 60.564,6.6 76.564,6.6 48.564,14.6 64.564,14.6 12.564,22.6 20.564,22.6 44.564,22.6 24.564,30.6 48.564,30.6 64.564,30.6 80.564,30.6 12.564,38.6 20.564,38.6 24.564,46.6 52.564,54.6 24.564,62.6 32.564,62.6 12.564,70.6 20.564,70.6 60.564,70.6 76.564,70.6 72.564,78.6 80.564,78.6
NetC1_1: C1.1 J2.2 J3.2 L1.1 pad.20 pad.21 R7.2 U3.2 U3.3 | length 2.8
  Top Layer w0.3: R7.2 35.255,20.752 v1(35.306,20.701)
NetC2_1: C2.1 J9.1 P1.2 pad.22 R15.2 U3.6 | length 18.7
  Top Layer w0.3: U3.6 61.827,47.266 v1(61.849,47.244) ; R15.2 60.879,40.767 61.006,40.894 v1(61.087,40.894) ; pad.22 64.463,55.88 C2.1
  POWER w0.2: v1(61.849,47.244) v1(71.12,47.244)
NetD1_1: D1.1 R2.2 | length 78.2
  Top Layer w0.3: R2.2 22.352,23.271 22.352,25.4 v1(26.289,29.337)
  Bottom Layer w0.3: D1.1 10.64,81.329 10.816,81.153 25.781,81.153 26.289,80.645 v1(26.289,29.337)
NetD1_2: D1.2 D2.2 Q1.1 R3.1 U1.1 | length 155.1
  Top Layer w0.3: v1(24.003,79.756) 30.099,79.756 32.131,77.724 64.213,77.724 64.389,77.9 64.389,80.137 ; Q1.1 64.389,80.137 ; R3.1 68.834,24.133 68.834,78.232 68.58,78.486 66.04,78.486 64.389,80.137 ; R3.1@68.834,24.006 68.849,23.991 69.862,23.991 72.39,21.463 72.39,16.129 72.583,15.936 U1.1
  Bottom Layer w0.3: 7.112,85.344 7.112,88.597 7.288,88.773 15.346,88.773 15.522,88.597 D2.2 ; D1.2 7.62,84.102 7.62,79.932 7.796,79.756 v1(24.003,79.756)
NetD2_1: D2.1 R11.2 | length 136.7
  Top Layer w0.3: R11.2 55.901,23.876 56.301,24.276 56.301,24.551 63.5,31.75 v1(63.5,36.576) ; v1(74.295,76.454) 74.295,39.116 v1(74.422,38.989)
  Bottom Layer w0.3: D2.1 19.022,88.11 19.431,88.519 74.246,88.519 74.422,88.343 74.422,82.503 74.295,82.376 v1(74.295,76.454) ; v1(63.5,36.576) 65.913,38.989 v1(74.422,38.989)
NetD3_2: D3.2 R14.2 | length 8.4
  Top Layer w0.3: v1(27.686,80.772) 32.261,80.772 R14.2
  Bottom Layer w0.3: D3.2 27.531,81.008 27.686,80.853 v1(27.686,80.772)
NetJ1_2: J1.2 J4.1 R1.1 R2.1 R3.2 R5.2 | length 167.1
  Top Layer w0.3: R2.1 24.922,23.541 25.322,23.941 25.622,23.941 27.462,25.781 29.845,25.781 v1(29.972,25.908) ; v1(49.657,19.939) 49.657,16.256 49.914,15.999 55.369,15.999 v1(55.372,16.002) ; R1.1 52.629,13.839 54.735,15.945 ; R3.2 68.707,18.702 ; v1(68.776,16.764) 68.776,17.595 68.707,17.664 68.707,18.702 ; v1(78.74,12.7) 78.797,12.643 78.797,12.056 78.916,11.938 ; J4.1 78.916,11.901 70.153,11.901 69.977,12.077 69.977,17.432 68.707,18.702 ; J1.2 85.295,83.185 85.471,83.009 85.471,22.987 85.09,22.606 81.517,22.606 R5.2 v1(81.28,18.923)
  Bottom Layer w0.3: v1(29.972,25.908) 53.164,25.908 53.34,25.732 53.34,22.806 50.473,19.939 v1(49.657,19.939) ; v1(55.372,16.002) 55.421,16.002 55.548,16.129 67.31,16.129 67.945,16.764 v1(68.776,16.764) ; v1(78.74,12.7) 78.74,15.191 78.916,15.367 78.994,15.367 81.28,17.653 v1(81.28,18.923)
NetJ3_1: J3.1 R1.2 | length 15.5
  Top Layer w0.3: R1.2 57.404,13.589 v1(57.531,13.462) ; v1(64.516,8.001) 65.867,6.65 J3.1
  Bottom Layer w0.3: v1(57.531,13.462) 62.992,8.001 v1(64.516,8.001)
NetJ4_6: J4.6 J4.7 J4.8 J4.9 R6.1 | length 24.5
  Top Layer w0.3: R6.1 75.514,24.511 v1(77.597,24.511) ; v1(79.629,17.526) 80.693,16.462 J4.7 80.837,15.282 81.503,15.282 82.05,14.735 82.05,11.808 ; J4.8 83.521,9.198 82.571,9.198 80.793,10.976 J4.6 80.837,11.12 81.503,11.12 82.05,11.667 82.05,11.808 ; J4.9 82.293,12.051 82.05,11.808
  Bottom Layer w0.3: v1(77.597,24.511) 79.629,22.479 v1(79.629,17.526)
NetJ5_1: J5.1 R7.1 | length 70.2
  Top Layer w0.3: R7.1 32.762,23.952 33.112,24.302 33.112,24.552 48.006,39.446 v1(48.006,42.037) ; v1(53.594,74.93) 52.832,74.168 52.832,67.183 v1(54.483,65.532)
  Bottom Layer w0.3: v1(48.006,42.037) 48.006,59.055 v1(54.483,65.532) ; J5.1 54.483,81.788 54.483,77.597 53.594,76.708 v1(53.594,74.93)
NetJ5_2: J5.2 R8.1 | length 89.3
  Top Layer w0.3: R8.1 25.705,13.843 23.036,13.843 22.86,14.019 22.86,17.018 26.924,21.082 26.924,21.209 37.765,32.05 37.765,55.399 37.65,55.514 37.65,58.986 49.911,71.247 v1(49.911,76.073) ; v1(49.784,80.518) 49.841,80.575 50.095,80.575 50.165,80.645 55.45,80.645 55.626,80.821 55.626,82.931 J5.2
  Bottom Layer w0.3: v1(49.784,80.518) 49.784,76.2 v1(49.911,76.073)
NetJ6_2: J6.2 R13.1 U2.25 | length 95.4
  Top Layer w0.3: J6.2 6.604,22.779 6.604,30.734 4.826,32.512 4.826,32.893 8.535,36.602 8.783,36.602 10.149,35.236 10.398,35.236 10.41,35.249 10.992,35.249 v1(11.049,35.306) ; v1(24.003,35.052) 28.067,35.052 v1(28.194,34.925) ; v1(31.369,30.988) 33.274,29.083 33.274,28.829 v1(33.147,28.702) ; v1(39.878,27.813) 39.878,27.732 40.132,27.478 R13.1
  Bottom Layer w0.3: U2.25 8.735,50.398 9.017,50.116 9.017,32.042 5.161,28.186 J6.2 ; v1(11.049,35.306) 11.811,34.544 23.495,34.544 v1(24.003,35.052) ; v1(28.194,34.925) 28.194,32.766 29.083,31.877 30.48,31.877 v1(31.369,30.988) ; v1(33.147,28.702) 34.036,27.813 v1(39.878,27.813)
NetJ7_2: J7.2 R12.1 U2.26 | length 102.3
  Top Layer w0.3: v1(7.874,47.752) 13.589,42.037 v1(13.589,22.225) ; v1(51.943,22.225) 59.178,22.225 60.835,23.882 R12.1
  Bottom Layer w0.3: U2.26 3.662,47.752 v1(7.874,47.752) ; v1(13.589,22.225) 11.811,20.447 11.811,12.319 12.827,11.303 16.715,11.303 17.018,11.606 J7.2 25.481,24.003 51.259,24.003 51.435,23.827 51.435,22.606 51.689,22.352 51.735,22.352 51.862,22.225 v1(51.943,22.225)
NetJ8_1: J8.1 U2.13 | length 76.2
  Top Layer w0.3: J8.1 7.747,10.287 v1(10.668,13.208) ; v1(10.668,16.891) 16.764,22.987 16.764,67.769 17.173,68.178 U2.13
  Bottom Layer w0.3: v1(10.668,13.208) v1(10.668,16.891)
NetL1_2: L1.2 U3.5 | length 13
  Top Layer w0.3: U3.5 57.15,45.007 57.326,44.831 61.546,44.831 65.504,48.665 L1.2
NetLabel1: D18.2 U2.3 | length 25.6
  Top Layer w0.3: v1(31.369,42.672) 37.338,48.641 37.338,55.222 35.525,57.035 35.525,57.185 v1(33.655,59.055)
  Bottom Layer w0.3: U2.3 31.182,42.778 31.288,42.672 v1(31.369,42.672) ; v1(33.655,59.055) 33.655,56.868 D18.2
NetLabel2: D16.2 D17.2 U2.9 | length 28.2
  Top Layer w0.3: v1(32.004,39.37) 32.627,39.37 33.979,38.018 33.979,37.903 v1(34.036,37.846)
  Bottom Layer w0.3: U2.9 30.988,55.986 30.988,52.56 33.782,49.766 D17.2 32.484,46.2 32.131,45.847 32.131,39.624 32.004,39.497 v1(32.004,39.37) ; D16.2 33.528,37.293 34.036,37.801 v1(34.036,37.846)
NetLabel4: D4.2 D5.2 D6.2 U2.5 | length 105.2
  Top Layer w0.3: U2.5 22.733,41.635 22.733,33.577 22.909,33.401 36.019,33.401 36.195,33.225 v1(36.195,33.147) ; v1(40.259,36.703) 40.259,40.132 43.815,43.688 51.767,43.688 51.943,43.512 v1(51.943,41.656) ; v1(56.134,35.687) 55.245,34.798 v1(55.245,32.893) 55.88,33.528 v1(61.976,33.528)
  Bottom Layer w0.3: v1(36.195,33.147) 39.881,36.833 39.953,36.76 40.202,36.76 v1(40.259,36.703) ; D6.2 41.91,29.309 41.91,28.116 42.086,27.94 48.26,27.94 50.038,29.718 D5.2 55.245,29.873 v1(55.245,32.893) ; v1(51.943,41.656) 51.943,39.878 v1(56.134,35.687) ; v1(61.976,33.528) 71.805,33.528 71.981,33.352 D4.2
NetLabel6: D12.2 D13.2 D14.2 D15.2 U2.8 | length 96.3
  Top Layer w0.3: U2.8 29.385,55.478 30.253,54.61 v1(36.576,54.61) ; v1(38.227,55.753) 39.497,55.753 40.767,57.023 40.767,58.547 41.021,58.801 54.483,58.801 v1(55.372,59.69) ; v1(76.327,52.832) 76.454,52.705 v1(81.661,52.705) 83.947,54.991 v1(83.947,59.436)
  Bottom Layer w0.3: v1(36.576,54.61) 36.633,54.667 37.141,54.667 v1(38.227,55.753) ; v1(55.372,59.69) 55.372,59.563 62.103,52.832 v1(76.327,52.832) ; D15.2 81.026,40.386 78.74,42.672 78.74,47.498 79.121,47.879 D14.2 81.153,52.197 v1(81.661,52.705) ; D12.2 81.28,60.043 D13.2 81.379,59.436 v1(83.947,59.436)
NetLabel7: D7.2 D8.2 D9.2 D10.2 D11.2 U2.15 | length 83.1
  Top Layer w0.3: U2.15 34.184,73.258 v1(34.544,72.898) 37.211,70.231 v1(37.211,64.135) ; v1(40.64,70.485) 47.371,70.485 v1(47.498,70.612) ; v1(54.864,67.183) 57.912,70.231 v1(57.912,72.771)
  Bottom Layer w0.3: D7.2 36.858,64.163 36.896,64.201 36.905,64.192 37.154,64.192 v1(37.211,64.135) ; v1(34.544,72.898) 40.287,72.898 D8.2 40.513,72.672 40.513,70.693 40.64,70.566 v1(40.64,70.485) ; v1(47.498,70.612) 52.771,65.339 53.02,65.339 v1(54.864,67.183) ; v1(57.912,72.771) D9.2 54.455,75.162 54.631,75.338 62.683,75.338 D10.2 65.25,74.472 65.454,74.676 75.488,74.676 75.664,74.5 D11.2
NetP1_3: P1.3 R12.2 R13.2 U2.30 | length 87.9
  Top Layer w0.3: v1(6.858,32.258) 9.017,30.099 v1(9.017,29.972) ; v1(16.256,19.177) 19.05,19.177 19.176,19.051 20.574,17.653 v1(20.574,16.637) ; v1(38.227,17.907) 38.284,17.964 38.554,17.964 40.132,19.543 ; P1.3 39.751,13.066 40.132,13.447 40.132,19.543 ; v1(43.942,20.193) 42.346,20.193 42.32,20.219 40.611,20.219 R13.2 40.132,19.543 ; v1(51.435,18.923) 51.562,19.05 58.011,19.05 59.789,20.828 R12.2
  Bottom Layer w0.3: U2.30 3.556,35.56 v1(6.858,32.258) ; v1(9.017,29.972) 16.256,22.733 v1(16.256,19.177) ; v1(20.574,16.637) 36.957,16.637 v1(38.227,17.907) ; v1(43.942,20.193) 45.212,18.923 v1(51.435,18.923)
NetP2_1: P2.1 P3.2 U2.1 | length 66.7
  Top Layer w0.3: v1(39.37,42.926) 39.37,50.673 P3.2 ; v1(39.37,63.5) 38.481,64.389 38.481,74.295 39.624,75.438 47.879,75.438 v1(48.641,76.2)
  Bottom Layer w0.3: U2.1 32.237,37.698 37.465,42.926 v1(39.37,42.926) ; v1(39.37,63.5) 39.497,63.373 39.497,54.864 P3.2 ; P2.1 45.339,82.55 48.006,82.55 48.641,81.915 v1(48.641,76.2)
NetP2_2: P2.2 U2.23 | length 67.3
  Top Layer w0.3: v1(19.05,53.721) v1(27.305,53.721) ; v1(36.83,80.645) 36.957,80.518 40.259,80.518 P2.2
  Bottom Layer w0.3: U2.23 5.313,53.721 v1(19.05,53.721) ; v1(27.305,53.721) 27.679,73.282 cw(c29.005,73.257) 29.234,74.563 ccw(c37.141,119.008) 36.528,73.869 ccw(c36.53,74.169) 36.83,74.169 v1(36.83,80.645)
NetP3_3: P3.3 U2.14 | length 34.6
  Top Layer w0.3: v1(41.529,65.024) 41.656,65.151 v1(41.656,69.596)
  Bottom Layer w0.3: U2.14 30.078,69.596 v1(41.656,69.596) ; P3.3 41.656,50.165 42.75,50.165 42.926,50.341 42.926,63.627 v1(41.529,65.024)
NetP3_4: P3.4 U2.11 | length 25
  Top Layer w0.3: U2.11 30.713,61.341 v1(36.957,61.341)
  Bottom Layer w0.3: v1(36.957,61.341) 36.957,61.269 35.999,60.311 35.999,54.298 40.427,49.87 40.427,49.836 41.073,49.19 41.107,49.19 41.446,48.851 41.446,47.835 P3.4
NetQ1_2: Q1.2 R4.1 | length 77.9
  Top Layer w0.3: R4.1 63.17,13.593 64.066,12.697 64.066,12.484 64.612,11.938 68.023,11.938 68.199,12.114 68.199,19.558 67.549,20.208 67.549,24.75 68.199,25.4 68.199,48.427 66.929,49.697 v1(66.929,76.327)
  Bottom Layer w0.3: v1(66.929,76.327) Q1.2
NetR5_1: R5.1 R9.2 U1.3 | length 49.4
  Top Layer w0.3: R9.2 44.886,13.66 46.482,15.256 46.482,17.653 v1(46.736,17.907) ; v1(75.311,18.161) 75.899,18.161 76.812,17.249 ; U1.3 76.662,14.986 76.812,15.136 76.812,17.249 78.74,19.177 78.74,24.638 78.994,24.892 81.153,24.892 R5.1
  Bottom Layer w0.3: v1(46.736,17.907) 58.053,17.907 58.122,17.838 74.988,17.838 v1(75.311,18.161)
NetR9_1: R9.1 R10.1 | length 9.9
  Top Layer w0.3: R9.1 42.236,15.56 47.552,20.876 R10.1
NetR14_1: R14.1 U2.27 | length 65.6
  Top Layer w0.3: U2.27 6.047,45.318 6.223,45.494 6.223,81.026 7.493,82.296 30.479,82.296 32.133,83.95 R14.1
NetR15_1: R15.1 R16.2 R17.1 U3.1 | length 106
  Top Layer w0.3: R17.1 22.987,0.938 23.163,0.762 37.416,0.762 37.592,0.938 37.592,18.088 37.976,18.472 37.976,27.429 37.97,27.435 37.97,27.683 49.715,39.428 55.471,39.428 56.459,40.416 56.459,41.118 59.479,44.139 60.89,44.139 v1(62.103,42.926) ; R16.2 50.62,48.771 50.971,48.771 51.546,49.346 52.14,49.346 v1(52.197,49.403) ; U3.1 57.65,48.757 59.806,48.757 v1(59.817,48.768) ; v1@59.795,48.746 v1(59.817,48.768) ; v1(61.595,51.308) 61.595,49.657 60.706,48.768 v1(59.817,48.768)
  Bottom Layer w0.3: v1(52.197,49.403) 56.728,49.403 58.633,51.308 v1(61.595,51.308) ; v1(59.817,48.768) 59.817,43.18 60.071,42.926 v1(62.103,42.926)
pads on no net: J4.2 J4.3 J4.4 J4.10 J4.11 P1.1 R17.3 U2. U2.4 U2.6 U2.7 U2.10 U2.12 U2.16 U2.17 U2.18 U2.19 U2.20 U2.21 U2.22 U2.24 U2.28

## Polygon pours and split planes (outlines as drawn)
GND on POWER "GND_L03_P007" (solid, pour order 7): 5.588,88.011 81.915,88.011 81.915,1.905 4.699,1.905 4.699,87.122 5.08,87.503
NetC2_1 on POWER "NETC2_1_L03_P002" (solid, pour order 2): 32.828,16.129 39.624,16.129 39.624,11.811 43.307,8.128 43.307,2.286 32.766,2.286 25.019,10.033 25.273,26.101 48.895,62.804 48.895,41.021 29.845,21.971 29.845,20.066
NetC2_1 on POWER "NETC2_1_L03_P001" (solid, pour order 1): 58.475,41.676 60.833,42.545 70.485,42.545 70.485,53.594 58.475,53.594 58.475,64.516 74.93,64.516 76.327,64.516 76.327,64.008 76.327,34.417 58.475,34.036
NetC2_1 on POWER "NETC2_1_L03_P003" (solid, pour order 3): 48.768,64.516 59.436,64.516 62.357,61.595 62.357,58.039 49.911,58.039 48.768,59.182
GND on GND "GND_L02_P004" (solid, pour order 4): 5.207,88.519 5.334,88.646 83.185,88.646 83.185,3.556 81.153,1.524 4.699,1.524 4.699,88.265 4.445,88.519
GND on Bottom Layer "GND_L04_P005" (solid, pour order 5): 5.207,89.281 5.715,88.773 82.804,88.773 82.804,1.016 82.042,1.778 2.032,1.778 2.032,85.852 5.08,88.9
GND on Top Layer "GND_L01_P006" (solid, pour order 6): 4.953,88.9 5.334,88.519 82.677,88.519 82.677,1.905 82.804,1.778 1.905,1.778 1.905,85.852

## Other copper
Top Layer:
  region net NetC1_1: 63.691,46.355 67.627,46.355 67.627,43.561 67.501,43.434 65.087,43.434 63.691,44.831
  region net NetC1_1: 56.896,50.419 56.896,49.53 57.277,49.149 57.277,48.26 54.229,48.26 54.229,50.038 54.483,50.292
  region net NetC1_1: 54.483,55.372 56.896,55.372 56.896,50.419 56.769,50.292 54.483,50.292
  region net NetC1_1: 30.607,22.098 30.734,22.098 36.703,22.098 36.703,18.923 30.734,18.923 30.607,18.923
POWER:
  region net NetC1_1: 61.155,46.355 67.437,46.355 67.437,43.561 64.897,43.561 64.897,45.212 60.96,45.212 61.155,45.407
  region net NetC1_1: 69.977,8.001 72.136,8.001 72.136,2.54 58.293,2.54 57.658,3.175 58.42,3.937 58.42,4.572 68.961,4.572 69.977,5.588
  region net NetC1_1: 51.181,8.636 53.086,8.636 53.086,4.699 53.34,4.445 56.388,4.445 56.388,2.794 56.134,2.54 51.181,2.54 51.181,6.985 50.038,8.128
  region net NetC1_1: 56.388,7.874 58.801,7.874 58.801,2.54 56.642,2.54 56.515,2.54 54.483,2.54 56.388,4.445
  region net NetC1_1: 34.163,21.844 37.973,21.844 51.562,8.255 51.562,5.969 38.481,19.05 34.163,19.05
  region net NetC1_1: 34.29,20.765 34.29,19.749 34.838,19.749 36.935,19.749 61.155,45.297 61.155,46.355 58.928,46.355 58.928,50.229 56.896,50.229 56.896,56.706 56.388,56.198 53.848,56.198 53.848,41.38

## Text inside footprints (layer, text, board x,y; h text height)
J4: Mechanical 1 "PCB EDGE" at 84.693,18.901 h1 r90